# EAGLE board InkTime_v6 (EAGLE 9.7.0)
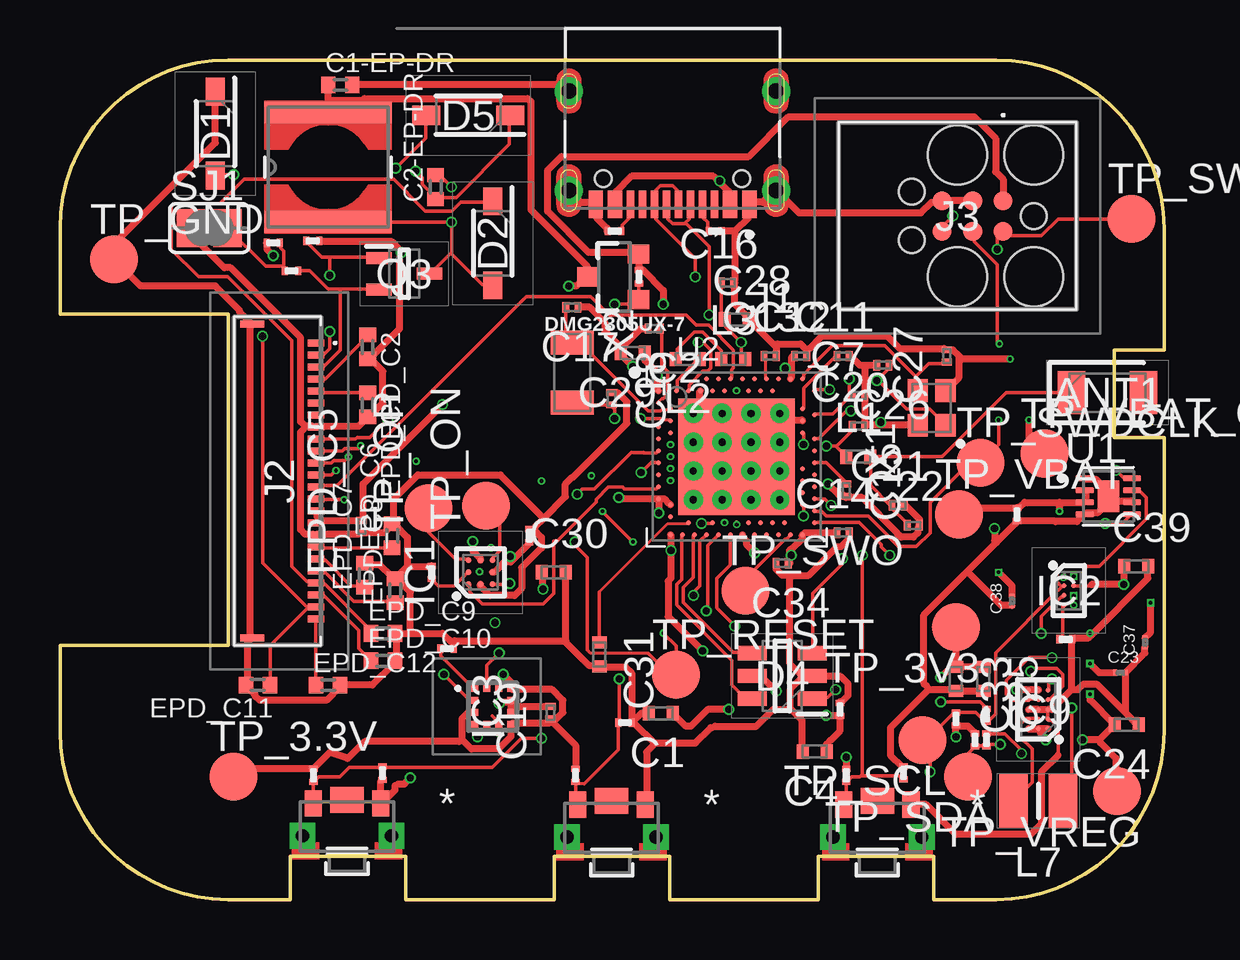
[diagram p0: board, top side]
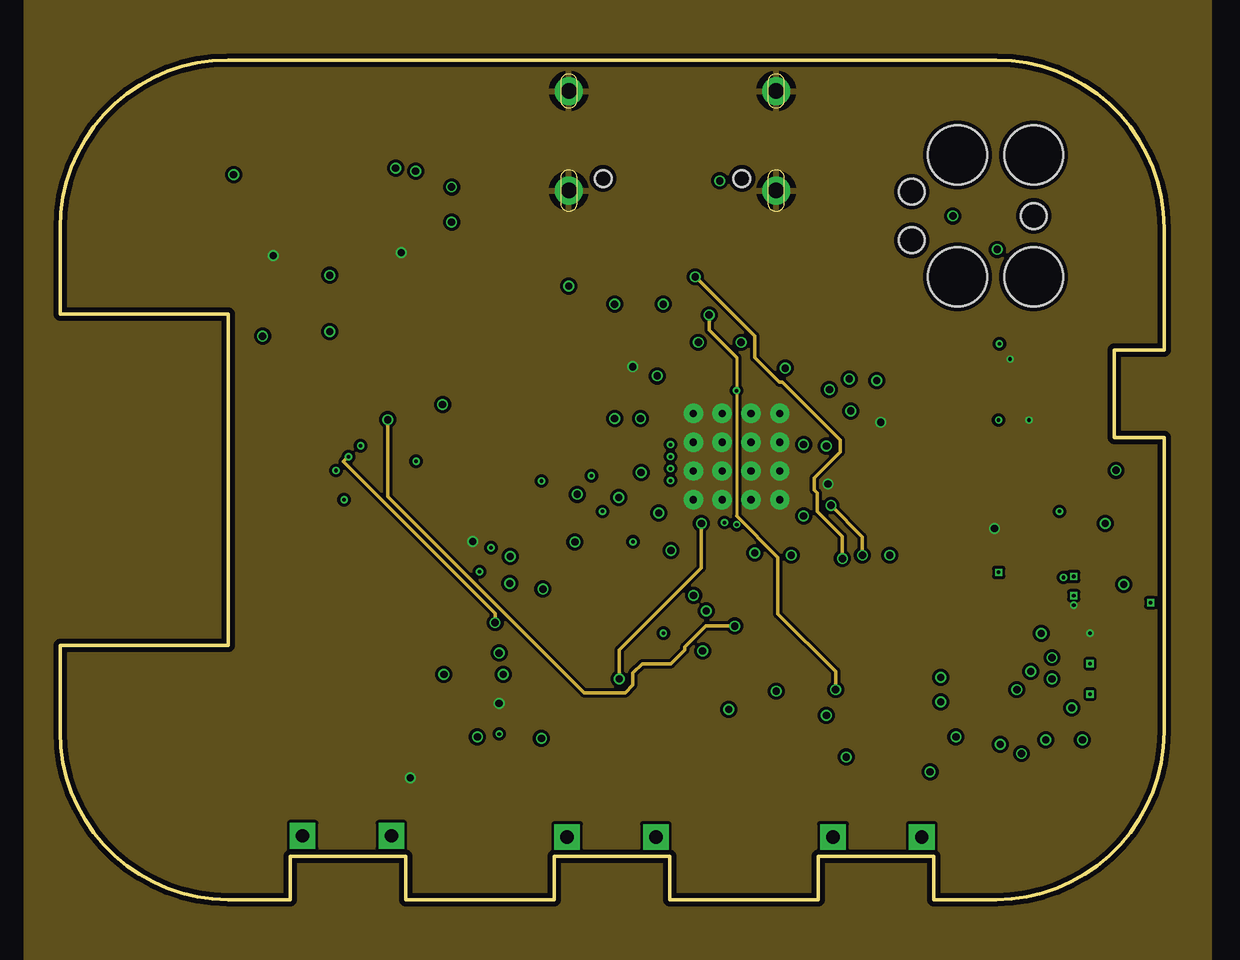
[diagram p1: board, inner layer Route2]
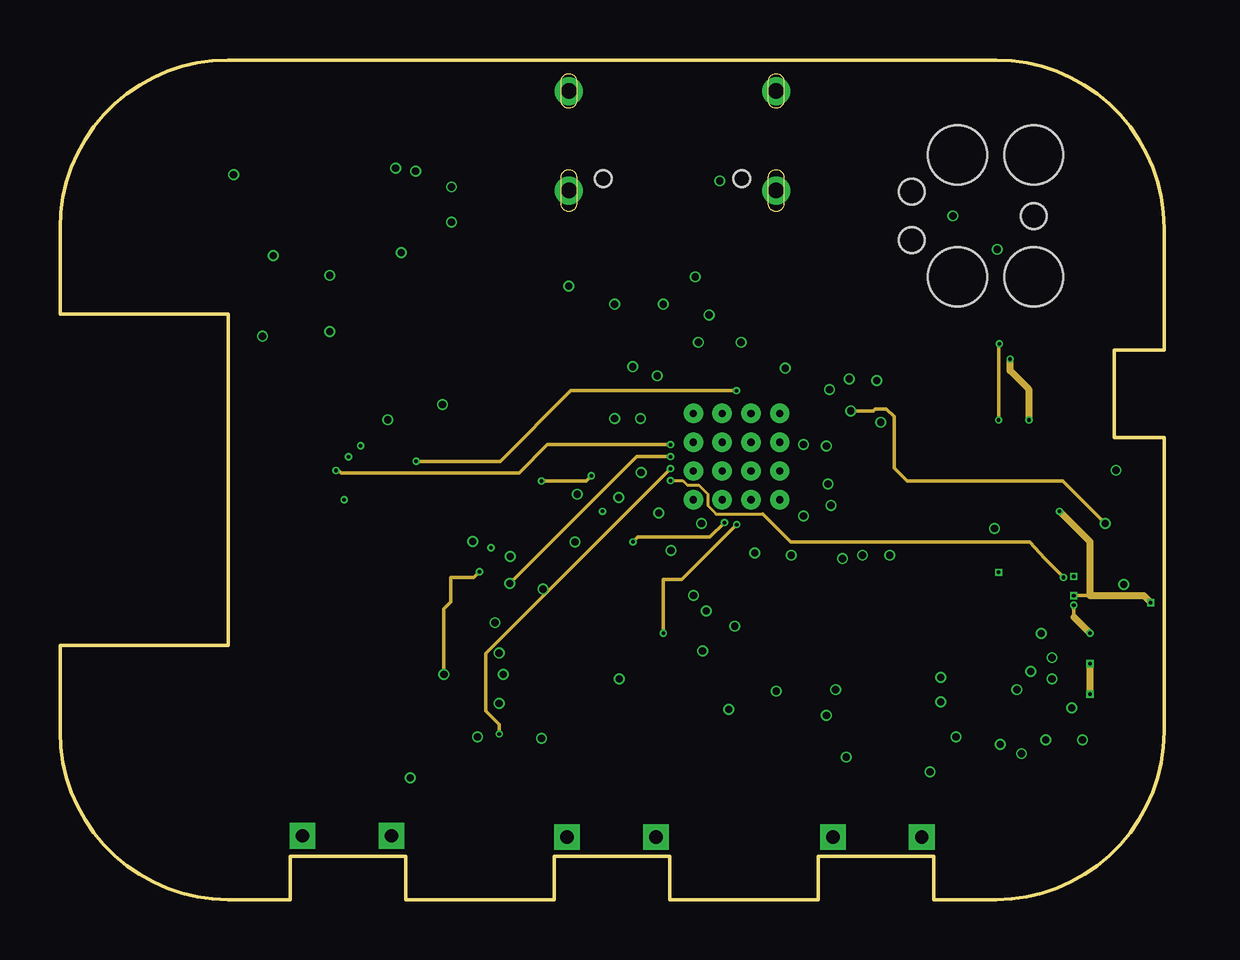
[diagram p2: board, inner layer Route15]
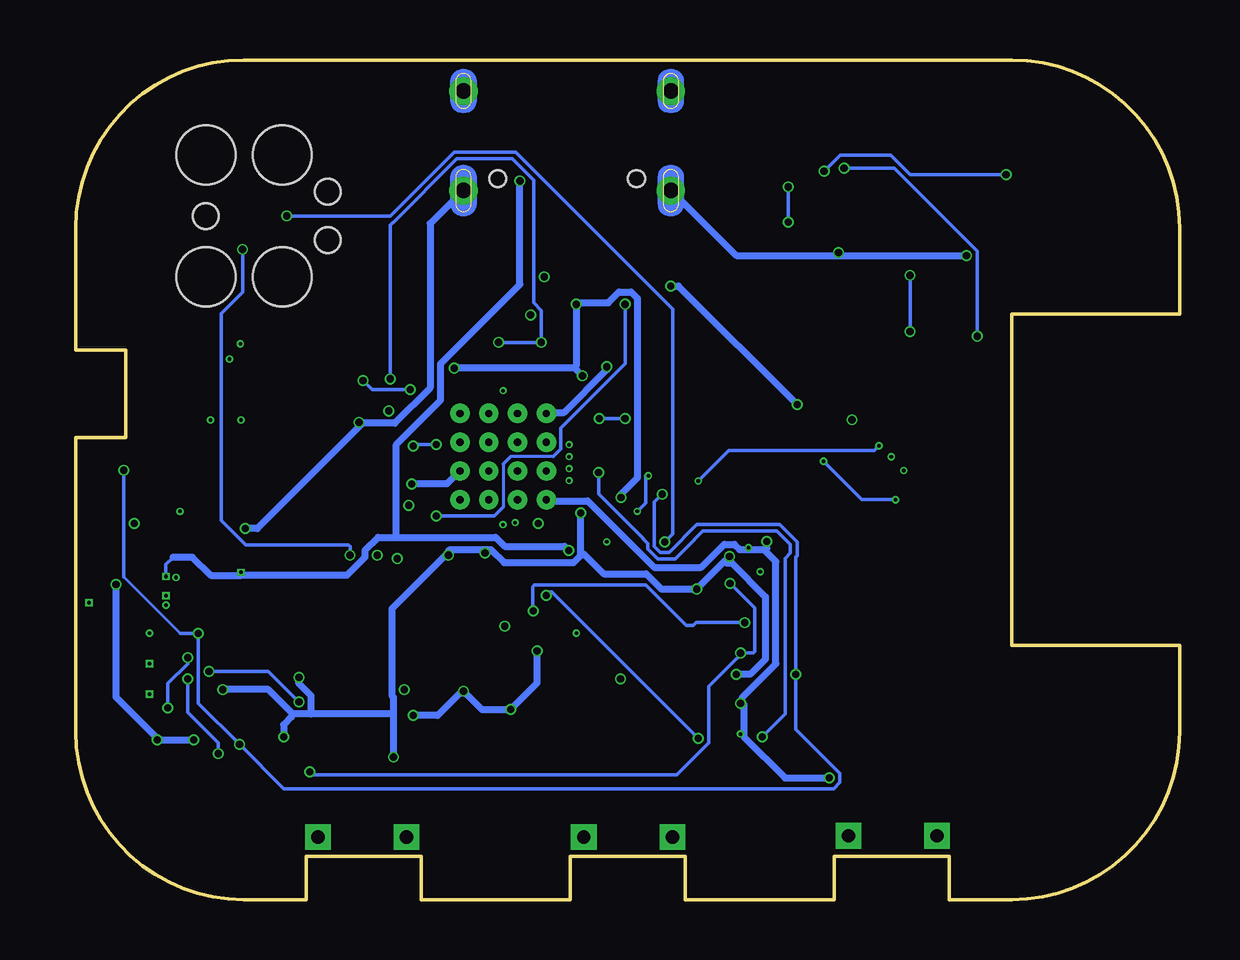
[diagram p3: board, bottom side, seen from below]

Size 46 x 35 mm. Coordinates in mm from the lower left corner, seen from the top.
Outline: 39,0 36.4,0 36.4,1.8 31.6,1.8 31.6,0 25.4,0 25.4,1.8 20.6,1.8 20.6,0 14.4,0 14.4,1.8 9.6,1.8 9.6,0 7,0 arc-90 0,7 0,10.6 7,10.6 7,24.4 0,24.4 0,28 arc-90 7,35 39,35 arc-90 46,28 46,22.91 43.92,22.91 43.92,19.26 46,19.26 46,7 arc-90 39,0
Copper layers (1+2*15+16): Top 0.035mm / dielectric 1.6mm / Route2 0.035mm / dielectric 0.15mm / Route15 0.035mm / dielectric 0.2mm / Bottom 0.035mm
Design rules "jlcpcb-2layers.dru *": minimum track width 5mil, minimum drill 0.15mm, track to track 5mil, track to pad 5mil, pad to pad 5mil, via to via 5mil, smd to smd 5mil, copper to edge 0.2mm, drill to drill 6mil, minimum pad ring 10mil, minimum via ring 3mil, stop-mask expansion 4mil, vias tented up to drill 0mil, thermal gap 10mil
Net classes: 1 turnu : width 0.15 mm

## Footprints (pad centres in the part's own frame; a part is rotated, then mirrored left to right if it is on the bottom)
2450AT18B100E_ANTC3216X140N = smd 1.15 x 1.8: 1 -1.5,0; 2 1.5,0
NORDIC_NRF_3_RESC0402_L = smd 0.5 x 0.6: 1 -0.5,0; 2 0.5,0
PERFECT_0402_0402 = smd 0.6 x 0.7: 1 -0.5,0; 2 0.5,0
NORDIC_NRF_3_RESC0201_L = smd 0.28 x 0.43: 1 -0.255,0; 2 0.255,0
GRM011R60J152KE01L_1_0201 = smd 0.35 x 0.25: 1 0,0.275; 2 0,-0.275
GRM011R60J152KE01L_2_CAPC0201X13N = smd 0.22 x 0.23: 1 -0.185,0; 2 0.185,0
ESP32_C6_LIBRARY_5_SOD3716X135N = smd 1.15 x 0.8: 1 -1.75,0; 2 1.75,0
ESP32_C6_LIBRARY_3_SOT95P280X145-6N = smd 1.2 x 0.6: 1 -1.25,0.95; 2 -1.25,0; 3 -1.25,-0.95; 4 1.25,-0.95; 5 1.25,0; 6 1.25,0.95
ESP32_C6_LIBRARY_4_ESP32_C6_LIBRARY_4_ESP32_C6_LIBRARY_4_ESP32_C6_LIBRARY_4_ESP32_WROVER_SPARKFUN-DISCRETESEMI_SOT23-3 = smd 0.8 x 0.9: 1 -0.95,-1; 2 0.95,-1; 3 0,1.1
DRV2605YZFR_BGA9C50P3X3_144X144X62 = smd 0.25 x 0.25: A1 -0.5,0.5; A2 0,0.5; A3 0.5,0.5; B1 -0.5,0; B2 0,0; B3 0.5,0; C1 -0.5,-0.5; C2 0,-0.5; C3 0.5,-0.5
BQ25180YBGR_BGA8C40P2X4_100X155X50 = smd 0.2 x 0.2: A1 -0.2,0.6; A2 0.2,0.6; B1 -0.2,0.2; B2 0.2,0.2; C1 -0.2,-0.2; C2 0.2,-0.2; D1 -0.2,-0.6; D2 0.2,-0.6
BMA423_BMA423 = smd 0.3 x 0.35: 1 -0.75,-0.775; 2 -0.25,-0.775; 3 0.25,-0.775; 4 0.75,-0.775; 7 0.75,0.775; 8 0.25,0.775; 9 -0.25,0.775; 10 -0.75,0.775 | smd 0.35 x 0.3: 5 0.775,-0.25; 6 0.775,0.25; 11 -0.775,0.25; 12 -0.775,-0.25
RT6160AWSC_BGA15C40P3X5_140X230X60 = smd 0.216 x 0.216: A1 -0.4,0.8; A2 0,0.8; A3 0.4,0.8; B1 -0.4,0.4; B2 0,0.4; B3 0.4,0.4; C1 -0.4,0; C2 0,0; C3 0.4,0; D1 -0.4,-0.4; D2 0,-0.4; D3 0.4,-0.4; E1 -0.4,-0.8; E2 0,-0.8; E3 0.4,-0.8
KH-TYPE-C-16P_KINGHELM_KH-TYPE-C-16P = smd 0.6 x 1.15: A1_B12 -3.2,4.725; A4_B9 -2.4,4.725; A9_B4 2.4,4.725; A12_B1 3.2,4.725 | smd 0.3 x 1.15: A5 -1.25,4.725; A6 -0.25,4.725; A7 0.25,4.725; A8 1.25,4.725; B5 1.75,4.725; B6 0.75,4.725; B7 -0.75,4.725; B8 -1.75,4.725 | drill 0.65 pad 1.05: SH1 -4.32,0; SH2 4.32,0; SH3 -4.32,4.15; SH4 4.32,4.15 | hole 0.7: -2.89,3.65; 2.89,3.65
503480-2400_5034802400 = smd 0.3 x 0.7: 1 -5.75,1.525; 2 -5.25,1.525; 3 -4.75,1.525; 4 -4.25,1.525; 5 -3.75,1.525; 6 -3.25,1.525; 7 -2.75,1.525; 8 -2.25,1.525; 9 -1.75,1.525; 10 -1.25,1.525; 11 -0.75,1.525; 12 -0.25,1.525; 13 0.25,1.525; 14 0.75,1.525; 15 1.25,1.525; 16 1.75,1.525; 17 2.25,1.525; 18 2.75,1.525; 19 3.25,1.525; 20 3.75,1.525; 21 4.25,1.525; 22 4.75,1.525; 23 5.25,1.525; 24 5.75,1.525 | smd 0.3 x 1: MP1 -6.54,-1.125; MP2 6.54,-1.125
TC2030-IDC_TC2030IDC = smd 0.783 x 0.783: 1 -0.953,-0.635; 2 -0.953,0.635; 3 0.317,-0.635; 4 0.317,0.635; 5 1.588,-0.635; 6 1.588,0.635 | hole 2.451: -2.223,-2.54; -2.223,2.54; 0.952,-2.54; 0.952,2.54 | hole 1.067: -2.223,0; 2.857,-1.016; 2.857,1.016
NORDIC_NRF_2_RESC0402_L = smd 0.5 x 0.6: 1 -0.5,0; 2 0.5,0
ESP32_C6_LIBRARY_2_IND_4828-WE-TPC_WRE = smd 0.9 x 5.3: 1 -2.286,0; 2 2.286,0
MLP2016SR47MT0S1_INDC2016X100N = smd 1.2 x 2.2: 1 -1.028,0; 2 1.028,0
ESP32_C6_LIBRARY_6_SOT65P210X110-3N = smd 1.05 x 0.5: 1 -1.05,0.65; 2 -1.05,-0.65; 3 1.05,0
CPF0201D7K68C1_0201 = smd 0.35 x 0.25: 1 0,0.275; 2 0,-0.275
ERA-1AEB3401C_0201 = smd 0.35 x 0.25: 1 0,0.275; 2 0,-0.275
ESP32_C6_LIBRARY_7_JUMPER_SJ = smd 1.168 x 1.6: 1 -0.762,0; 2 0.762,0
2025-10-22_07-23-44_LIBRARY_SW_EVP-AKE31A_PAN = smd 0.711 x 1.092: 1 -1.4,-0.972; 2 1.4,-0.972 | drill 0.559 pad 0.914 square: 3 -1.848,0.381; 4 1.848,0.381 | smd 1.397 x 1.092: 5 0,-1.124
HECTOR_WATCH_1_TP20R = smd 2 x 2: TP 0,0
ESP32_C6_LIBRARY_SON50P200X200X80-9N = smd 0.76 x 0.27: 1 -0.985,0.75; 2 -0.985,0.25; 3 -0.985,-0.25; 4 -0.985,-0.75; 5 0.985,-0.75; 6 0.985,-0.25; 7 0.985,0.25; 8 0.985,0.75 | smd 0.9 x 1.3: 9 0,0
NORDIC_NRF_4_AQFN50P700X700X85_HS-74N = smd 4.85 x 4.85: P$74 0,0 | drill 0.3 pad 0.6: P$75 -1.8,1.8; P$76 -0.6,1.8; P$77 0.6,1.8; P$78 1.8,1.8; P$79 -1.8,0.6; P$80 -0.6,0.6; P$81 0.6,0.6; P$82 1.8,0.6; P$83 -1.8,-0.6; P$84 -0.6,-0.6; P$85 0.6,-0.6; P$86 1.8,-0.6; P$87 -1.8,-1.8; P$88 -0.6,-1.8; P$89 0.6,-1.8; P$90 1.8,-1.8 | smd 0.2 x 0.2: P$A8 -1.25,3.25; P$A10 -0.75,3.25; P$A12 -0.25,3.25; P$A14 0.25,3.25; P$A16 0.75,3.25; P$A18 1.25,3.25; P$A20 1.75,3.25; P$A22 2.25,3.25; P$A23 2.75,3.25; P$AA24 3.25,-2.25; P$AB2 -2.75,-2.5; P$AC5 -2,-2.75; P$AC9 -1,-2.75; P$AC11 -0.5,-2.75; P$AC13 0,-2.75; P$AC15 0.5,-2.75; P$AC17 1,-2.75; P$AC19 1.5,-2.75; P$AC21 2,-2.75; P$AC24 3.25,-2.75; P$AD2 -2.75,-3.25; P$AD4 -2.25,-3.25; P$AD6 -1.75,-3.25; P$AD8 -1.25,-3.25; P$AD10 -0.75,-3.25; P$AD12 -0.25,-3.25; P$AD14 0.25,-3.25; P$AD16 0.75,-3.25; P$AD18 1.25,-3.25; P$AD20 1.75,-3.25; P$AD22 2.25,-3.25; P$AD23 2.75,-3.25; P$B1 -3.25,2.75; P$B3 -2.5,2.75; P$B5 -2,2.75; P$B7 -1.5,2.75; P$B9 -1,2.75; P$B11 -0.5,2.75; P$B13 0,2.75; P$B15 0.5,2.75; P$B17 1,2.75; P$B19 1.5,2.75; P$B24 3.25,2.75; P$C1 -3.25,2.25; P$D2 -2.75,2; P$D23 2.75,2; P$E24 3.25,1.75; P$F2 -2.75,1.5; P$F23 2.75,1.5; P$G1 -3.25,1.25; P$H2 -2.75,1; P$H23 2.75,1; P$J1 -3.25,0.75; P$J24 3.25,0.75; P$K2 -2.75,0.5; P$L1 -3.25,0.25; P$L24 3.25,0.25; P$M2 -2.75,0; P$N1 -3.25,-0.25; P$N24 3.25,-0.25; P$P2 -2.75,-0.5; P$P23 2.75,-0.5; P$R1 -3.25,-0.75; P$R24 3.25,-0.75; P$T2 -2.75,-1; P$T23 2.75,-1; P$U1 -3.25,-1.25; P$U24 3.25,-1.25; P$V23 2.75,-1.5; P$W1 -3.25,-1.75; P$W24 3.25,-1.75; P$Y2 -2.75,-2; P$Y23 2.75,-2
NORDIC_NRF_BT-XTAL_2016_N = smd 0.95 x 0.85: 1 -0.725,-0.575; 2 0.725,-0.575; 3 0.725,0.575; 4 -0.725,0.575
NORDIC_NRF_1_XTAL_3215_N = smd 1 x 1.8: 1 -1.25,0; 2 1.25,0

## Placement (x,y rotation side)
ANT1  2450AT18B100E  [2450AT18B100E_ANTC3216X140N]  43.65,21.13 0 top
C1  4.7μF  [NORDIC_NRF_3_RESC0402_L]  25.04,7.77 180 top
C1-EP-DR  10uF  [PERFECT_0402_0402]  11.68,33.96 0 top
C2  100nF  [NORDIC_NRF_3_RESC0201_L]  24.76,23.8 180 top
C2-EP-DR  4.7uF/25V  [PERFECT_0402_0402]  15.65,29.7 90 top
C3  1uF  [GRM011R60J152KE01L_1_0201]  15.49,13.64 0 top
C4  4.7uF  [NORDIC_NRF_3_RESC0402_L]  31.44,6.17 180 top
C5  1uF  [GRM011R60J152KE01L_1_0201]  13.44,5.27 180 top
C6  0.1uF  [GRM011R60J152KE01L_1_0201]  32.51,7.92 180 top
C7  N.C.  [NORDIC_NRF_3_RESC0201_L]  33.27,21.01 0 top
C8  0.1uF  [GRM011R60J152KE01L_1_0201]  19.55,15.16 0 top
C9  0.1uF  [GRM011R60J152KE01L_1_0201]  39.87,16.05 180 top
C10  1uF  [GRM011R60J152KE01L_1_0201]  23.54,7.37 270 top
C11  100pF  [NORDIC_NRF_3_RESC0201_L]  32.63,22.66 0 top
C12  100nF  [NORDIC_NRF_3_RESC0201_L]  30.86,22.66 0 top
C13  N.C.  [NORDIC_NRF_3_RESC0201_L]  29.58,22.66 0 top
C14  100nF  [NORDIC_NRF_3_RESC0201_L]  32.63,15.29 0 top
C15  820pF  [NORDIC_NRF_3_RESC0201_L]  32.76,17.07 270 top
C16  47nF  [NORDIC_NRF_3_RESC0201_L]  27.81,25.71 0 top
C17  12pF  [NORDIC_NRF_3_RESC0201_L]  21.33,24.69 180 top
C18  12pF  [NORDIC_NRF_3_RESC0201_L]  22.98,20.88 270 top
C19  100nF  [NORDIC_NRF_3_RESC0201_L]  20.44,7.8 90 top
C20  1pF  [NORDIC_NRF_3_RESC0201_L]  33.27,19.74 0 top
C21  1pF  [NORDIC_NRF_3_RESC0201_L]  34.92,16.43 0 top
C22  N.C.  [NORDIC_NRF_3_RESC0201_L]  35.55,15.6 0 top
C23  0.1uF  [GRM011R60J152KE01L_2_CAPC0201X13N]  44.19,9.45 0 top
C24  10uF  [NORDIC_NRF_3_RESC0402_L]  44.44,7.29 180 top
C25  22uF  [NORDIC_NRF_3_RESC0402_L]  38.47,9.2 270 top
C26  12pF  [NORDIC_NRF_3_RESC0201_L]  34.28,22.28 180 top
C27  12pF  [NORDIC_NRF_3_RESC0201_L]  36.95,22.66 90 top
C28  1.0μF  [NORDIC_NRF_3_RESC0402_L]  28.19,24.18 0 top
C29  4.7μF  [NORDIC_NRF_3_RESC0402_L]  23.87,22.78 180 top
C30  4.7μF  [NORDIC_NRF_3_RESC0402_L]  20.57,13.64 0 top
C31  4.7μF  [NORDIC_NRF_3_RESC0402_L]  22.47,10.21 270 top
C32  1uF  [GRM011R60J152KE01L_1_0201]  35.15,5.28 0 top
C33  22uF  [NORDIC_NRF_3_RESC0402_L]  37.33,9.2 270 top
C34  100nF  [NORDIC_NRF_3_RESC0201_L]  30.09,14.02 180 top
C37  1uF  [GRM011R60J152KE01L_2_CAPC0201X13N]  45.21,10.72 90 top
C38  1uF  [GRM011R60J152KE01L_2_CAPC0201X13N]  39.66,12.44 90 top
C39  10uF  [NORDIC_NRF_3_RESC0402_L]  44.85,13.89 0 top
D1  MBR0530  [ESP32_C6_LIBRARY_5_SOD3716X135N]  6.47,31.93 270 top
D2  MBR0530  [ESP32_C6_LIBRARY_5_SOD3716X135N]  18.03,27.36 270 top
D4  USBLC6-2SC6Y  [ESP32_C6_LIBRARY_3_SOT95P280X145-6N]  30.09,9.32 180 top
D5  MBR0530  [ESP32_C6_LIBRARY_5_SOD3716X135N]  17.01,32.69 180 top
DMG2305UX-7  20V/4.2A/52mΩ/1.4W  [ESP32_C6_LIBRARY_4_ESP32_C6_LIBRARY_4_ESP32_C6_LIBRARY_4_ESP32_C6_LIBRARY_4_ESP32_WROVER_SPARKFUN-DISCRETESEMI_SOT23-3]  23.11,25.96 90 top
EPD_C1  1uF/50V  [PERFECT_0402_0402]  12.82,20.62 270 top
EPD_C2  1uF/50V  [PERFECT_0402_0402]  12.82,23.04 270 top
EPD_C5  0.1uF/50V  [NORDIC_NRF_3_RESC0201_L]  12.57,15.55 90 top
EPD_C6  1uF/50V  [PERFECT_0402_0402]  13.84,15.16 90 top
EPD_C7  1uF/50V  [PERFECT_0402_0402]  12.69,13.51 90 top
EPD_C8  1uF/50V  [PERFECT_0402_0402]  13.96,12.88 90 top
EPD_C9  1uF/50V  [PERFECT_0402_0402]  13.46,11.1 0 top
EPD_C10  1uF/50V  [PERFECT_0402_0402]  13.46,9.96 0 top
EPD_C11  1uF/50V  [PERFECT_0402_0402]  8.25,8.94 180 top
EPD_C12  1uF/50V  [PERFECT_0402_0402]  11.17,8.94 0 top
IC1  DRV2605YZFR  [DRV2605YZFR_BGA9C50P3X3_144X144X62]  17.52,13.64 90 top
IC2  BQ25180YBGR  [BQ25180YBGR_BGA8C40P2X4_100X155X50]  42.03,12.88 0 top
IC3  BMA421  [BMA423_BMA423]  18.03,8.05 270 top
IC9  RT6160AWSC  [RT6160AWSC_BGA15C40P3X5_140X230X60]  40.76,7.92 180 top
J1  KH-TYPE-C-16P  [KH-TYPE-C-16P_KINGHELM_KH-TYPE-C-16P]  25.52,33.71 180 top
J2  503480-2400  [503480-2400_5034802400]  9.14,17.45 270 top
J3  TC2030-IDC  [TC2030-IDC_TC2030IDC]  38.35,28.5 180 top
L1  3.9nH  [NORDIC_NRF_2_RESC0402_L]  33.27,18.47 0 top
L2  10μH  [NORDIC_NRF_2_RESC0402_L]  26.16,22.53 180 top
L3  15nH  [NORDIC_NRF_2_RESC0402_L]  28.06,22.53 0 top
L5  68uH  [ESP32_C6_LIBRARY_2_IND_4828-WE-TPC_WRE]  11.17,30.53 90 top
L7  FTC252012SR47MBCA  [MLP2016SR47MT0S1_INDC2016X100N]  40.76,4.12 0 top
Q3  SI1308EDL-T1-GE3  [ESP32_C6_LIBRARY_6_SOT65P210X110-3N]  14.34,26.09 0 top
R1  10K  [CPF0201D7K68C1_0201]  41.9,10.85 270 top
R1_EP_DR1  0.47  [CPF0201D7K68C1_0201]  9.65,26.21 90 top
R1_USB  5K1  [CPF0201D7K68C1_0201]  27.3,27.86 270 top
R2  0  [CPF0201D7K68C1_0201]  38.6,6.66 180 top
R2_EP_DR  10K  [CPF0201D7K68C1_0201]  10.53,27.46 270 top
R2_USB  5K1  [CPF0201D7K68C1_0201]  23.11,27.86 270 top
R3  0  [CPF0201D7K68C1_0201]  16.12,10.47 270 top
R4  0  [CPF0201D7K68C1_0201]  38.6,7.67 180 top
R5  10K  [CPF0201D7K68C1_0201]  10.56,5.18 180 top
R7  10K  [CPF0201D7K68C1_0201]  32.76,5.18 180 top
R8  10K  [CPF0201D7K68C1_0201]  21.48,5.18 180 top
R17  3K3  [ERA-1AEB3401C_0201]  37.33,7.54 180 top
R18  3K3  [ERA-1AEB3401C_0201]  38.12,6.66 0 top
R_PWR_EPD  10K  [CPF0201D7K68C1_0201]  24.12,25.96 180 top
R_TYPE_SEL  2.2  [CPF0201D7K68C1_0201]  8.88,27.38 90 top
SJ1  [ESP32_C6_LIBRARY_7_JUMPER_SJ]  6.22,27.99 0 top
SW_DN  2025-10-22_07-23-44_LIBRARY_EVP-AKE31ASW_EVP-AKE31A_PAN  [2025-10-22_07-23-44_LIBRARY_SW_EVP-AKE31A_PAN]  34.06,2.99 180 top
SW_ENT  2025-10-22_07-23-44_LIBRARY_EVP-AKE31ASW_EVP-AKE31A_PAN  [2025-10-22_07-23-44_LIBRARY_SW_EVP-AKE31A_PAN]  22.98,2.99 180 top
SW_UP  2025-10-22_07-23-44_LIBRARY_EVP-AKE31ASW_EVP-AKE31A_PAN  [2025-10-22_07-23-44_LIBRARY_SW_EVP-AKE31A_PAN]  11.96,3.04 180 top
TP_3.3V  HECTOR_WATCH_1_TPTP20R  [HECTOR_WATCH_1_TP20R]  7.23,5.13 0 top
TP_3V3  HECTOR_WATCH_1_TPTP20R  [HECTOR_WATCH_1_TP20R]  37.33,11.35 180 top
TP_GND  HECTOR_WATCH_1_TPTP20R  [HECTOR_WATCH_1_TP20R]  2.25,26.69 0 top
TP_ON  HECTOR_WATCH_1_TPTP20R  [HECTOR_WATCH_1_TP20R]  17.74,16.41 90 top
TP_OP  HECTOR_WATCH_1_TPTP20R  [HECTOR_WATCH_1_TP20R]  15.36,16.31 90 top
TP_RESET  HECTOR_WATCH_1_TPTP20R  [HECTOR_WATCH_1_TP20R]  25.67,9.37 0 top
TP_SCL  HECTOR_WATCH_1_TPTP20R  [HECTOR_WATCH_1_TP20R]  35.94,6.66 180 top
TP_SDA  HECTOR_WATCH_1_TPTP20R  [HECTOR_WATCH_1_TP20R]  37.84,5.13 180 top
TP_SWDCLK  HECTOR_WATCH_1_TPTP20R  [HECTOR_WATCH_1_TP20R]  38.35,18.21 0 top
TP_SWIO  HECTOR_WATCH_1_TPTP20R  [HECTOR_WATCH_1_TP20R]  44.65,28.38 0 top
TP_SWO  HECTOR_WATCH_1_TPTP20R  [HECTOR_WATCH_1_TP20R]  28.57,12.88 0 top
TP_VBAT  HECTOR_WATCH_1_TPTP20R  [HECTOR_WATCH_1_TP20R]  37.46,16.05 0 top
TP_VBAT_GND  HECTOR_WATCH_1_TPTP20R  [HECTOR_WATCH_1_TP20R]  41.02,18.59 0 top
TP_VREG  HECTOR_WATCH_1_TPTP20R  [HECTOR_WATCH_1_TP20R]  44.04,4.51 180 top
U1  MAX17048G+T10  [ESP32_C6_LIBRARY_SON50P200X200X80-9N]  43.68,16.81 0 top
U2  NRF52840_QF  [NORDIC_NRF_4_AQFN50P700X700X85_HS-74N]  28.19,18.47 0 top
X1  32MHz  [NORDIC_NRF_BT-XTAL_2016_N]  36.32,20.5 90 top
X2  32.768kHz  [NORDIC_NRF_1_XTAL_3215_N]  21.34,21.97 270 top

## Library data of the parts
ANT1 = InkTime_v5; ARROW_PART_NUMBER: 2450AT18B100E; ARROW_PRICE-STOCK: https://www.arrow.com/en/products/2450at18b100e/johanson-dielectrics?utm_currency=USD&region=nac; DESCRIPTION: Antennas 2.45GHz ANTENNA; HEIGHT: 1.4mm; MANUFACTURER_NAME: JOHANSON TECHNOLOGY; MANUFACTURER_PART_NUMBER: 2450AT18B100E; MOUSER_PART_NUMBER: 609-2450AT18B100E; MOUSER_PRICE-STOCK: https://www.mouser.co.uk/ProductDetail/Johanson-Technology/2450AT18B100E?qs=yCnrNFeXz%252Bh5MFsFIXGZGA%3D%3D
C1 C2 C4 C7 C11-C22 C24-C28 C30 C31 C33 C39 L1-L3 R1-R4 R17 R18 TP_3.3V TP_3V3 TP_GND TP_RESET TP_SCL TP_SDA TP_SWDCLK TP_SWIO TP_SWO TP_VREG U2 X1 = InkTime_v5
C1-EP-DR C2-EP-DR C3 C5 C6 C8-C10 C29 C32 C34 EPD_C1 EPD_C2 EPD_C5-EPD_C12 R1_EP_DR1 R1_USB R2_EP_DR R2_USB R5 R7 R8 R_PWR_EPD R_TYPE_SEL SJ1 TP_ON TP_OP TP_VBAT TP_VBAT_GND X2 = Library_proiect
C23 C37 C38 = InkTime_v5; AVAILABILITY: In Stock; CHECK_PRICES: https://www.snapeda.com/parts/GRM011R60J152KE01L/Murata/view-part/?ref=eda; DESCRIPTION: SMD Capacitor X5R(EIA) with Capacitance: 1500pF Tol. 10%. Rated Voltage: 6.3Vdc; MF: Murata; MP: GRM011R60J152KE01L; PACKAGE: 0201 Murata; PRICE: None; SNAPEDA_LINK: https://www.snapeda.com/parts/GRM011R60J152KE01L/Murata/view-part/?ref=snap
D1 D2 D5 = Library_proiect; AVAILABILITY: In Stock; CHECK_PRICES: https://www.snapeda.com/parts/MBR0530/Onsemi/view-part/?ref=eda; DESCRIPTION: Diode Schottky 30 V 500mA Surface Mount SOD-123; MF: ON Semiconductor; MP: MBR0530; PACKAGE: SOD-123-2 ON Semiconductor; PRICE: None; PURCHASE-URL: https://www.snapeda.com/api/url_track_click_mouser/?unipart_id=179458&manufacturer=ON Semiconductor&part_name=MBR0530&search_term=None; SNAPEDA_LINK: https://www.snapeda.com/parts/MBR0530/Onsemi/view-part/?ref=snap
D4 = Library_proiect; AVAILABILITY: In Stock; CHECK_PRICES: https://www.snapeda.com/parts/USBLC6-2SC6Y/STMicroelectronics/view-part/?ref=eda; DESCRIPTION: 17V Clamp 5A (8/20µs) Ipp Tvs Diode Surface Mount SOT-23-6; MF: STMicroelectronics; MP: USBLC6-2SC6Y; PACKAGE: SOT-23-6 STMicroelectronics; PRICE: None; SNAPEDA_LINK: https://www.snapeda.com/parts/USBLC6-2SC6Y/STMicroelectronics/view-part/?ref=snap
DMG2305UX-7 = Library_proiect; PROD_ID: TRAN-14388
IC1 = Library_proiect; ARROW_PART_NUMBER: DRV2605YZFR; ARROW_PRICE-STOCK: https://www.arrow.com/en/products/drv2605yzfr/texas-instruments?region=nac; DESCRIPTION: Haptic Driver for ERM/LRA with Built-In Library and Smart Loop Architecture; HEIGHT: 0.625mm; MANUFACTURER_NAME: Texas Instruments; MANUFACTURER_PART_NUMBER: DRV2605YZFR
IC2 = InkTime_v5; ARROW_PART_NUMBER: BQ25180YBGR; ARROW_PRICE-STOCK: https://www.arrow.com/en/products/bq25180ybgr/texas-instruments?utm_currency=USD&region=nac; DESCRIPTION: Charger IC Lithium Ion/Polymer, Lithium Iron Phosphate 8-DSBGA (1.6x1.1); HEIGHT: 0.5mm; MANUFACTURER_NAME: Texas Instruments; MANUFACTURER_PART_NUMBER: BQ25180YBGR; MOUSER_PART_NUMBER: 595-BQ25180YBGR; MOUSER_PRICE-STOCK: https://www.mouser.co.uk/ProductDetail/Texas-Instruments/BQ25180YBGR?qs=doiCPypUmgEWjAK%252BJAX6Tw%3D%3D
IC3 = InkTime_v5; ARROW_PART_NUMBER: BMA423; ARROW_PRICE-STOCK: https://www.arrow.com/en/products/bma423/bosch; DESCRIPTION: Accelerometers Triaxial low-g 12bit Acceleration Sensor; HEIGHT: 1mm; MANUFACTURER_NAME: BOSCH; MANUFACTURER_PART_NUMBER: BMA423; MOUSER_PART_NUMBER: 262-BMA423; MOUSER_PRICE-STOCK: https://www.mouser.co.uk/ProductDetail/Bosch-Sensortec/BMA423?qs=HXFqYaX1Q2xC%252BSgeGoX3mg%3D%3D
IC9 = InkTime_v5; DESCRIPTION: Buck-Boost Regulator Positive Output Step-Up/Step-Down I2C DC-DC Controller IC 15-WL-CSP (BSC) (1.4x2.3); HEIGHT: 0.6mm; MANUFACTURER_NAME: RICHTEK; MANUFACTURER_PART_NUMBER: RT6160AWSC; MOUSER_PART_NUMBER: 835-RT6160AWSC; MOUSER_PRICE-STOCK: https://www.mouser.co.uk/ProductDetail/Richtek/RT6160AWSC?qs=amGC7iS6iy%2FLd9PSoixZXQ%3D%3D
J1 = Library_proiect; AVAILABILITY: Not in stock; CHECK_PRICES: https://www.snapeda.com/parts/KH-TYPE-C-16P/Kinghelm/view-part/?ref=eda; MF: kinghelm; MP: KH-TYPE-C-16P; PACKAGE: None; PRICE: None; SNAPEDA_LINK: https://www.snapeda.com/parts/KH-TYPE-C-16P/Kinghelm/view-part/?ref=snap
J2 = Library_proiect; DESCRIPTION: FFC & FPC Connectors 0.5mm FPC RA SMT Dual Contact 24Ckt; HEIGHT: 1.87mm; MANUFACTURER_NAME: Molex; MANUFACTURER_PART_NUMBER: 503480-2400; MOUSER_PART_NUMBER: 538-503480-2400; MOUSER_PRICE-STOCK: https://www.mouser.co.uk/ProductDetail/Molex/503480-2400?qs=OAhjpuo3Vu7efIoxFh9AOw%3D%3D
J3 = InkTime_v5; DESCRIPTION: CABLE ADAPTER 6 POS; HEIGHT: 19mm; MANUFACTURER_NAME: Tag Connect; MANUFACTURER_PART_NUMBER: TC2030-IDC
L5 = Library_proiect; COPYRIGHT: Copyright (C) 2024 Ultra Librarian. All rights reserved.; MANUFACTURER_PART_NUMBER: 744043680; MFR_NAME: Wurth Electronics
L7 = InkTime_v5; DESCRIPTION: SMD / SMT Inductors (Coils), L=0.47?H, L x W x T :; HEIGHT: 1mm; JLCPCB: https://jlcpcb.com/partdetail/6763488-FTC252012SR47MBCA/C5832368; MANUFACTURER_NAME: TDK; MANUFACTURER_PART_NUMBER: FTC252012SR47MBCA
Q3 = Library_proiect; AVAILABILITY: In Stock; CHECK_PRICES: https://www.snapeda.com/parts/SI1308EDL-T1-GE3/Vishay+Siliconix/view-part/?ref=eda; DESCRIPTION: Si1308EDL-T1-GE3 N-channel MOSFET Transistor, 1.5 A, 30 V, 3-Pin SC-70 | Siliconix / Vishay SI1308EDL-T1-GE3; MF: Vishay Siliconix; MP: SI1308EDL-T1-GE3; PACKAGE: SOT-323 Vishay Semiconductor; PRICE: None; PURCHASE-URL: https://www.snapeda.com/api/url_track_click_mouser/?unipart_id=274603&manufacturer=Vishay Siliconix&part_name=SI1308EDL-T1-GE3&search_term=None; SNAPEDA_LINK: https://www.snapeda.com/parts/SI1308EDL-T1-GE3/Vishay+Siliconix/view-part/?ref=snap
SW_DN SW_ENT SW_UP = Library_proiect; COPYRIGHT: Copyright (C) 2025 Ultra Librarian. All rights reserved.; DIGI-KEY_PART_NUMBER_1: P123437TR-ND; DIGI-KEY_PART_NUMBER_2: P123437CT-ND; DIGI-KEY_PART_NUMBER_3: P123437DKR-ND; MANUFACTURER_NAME: Panasonic; MANUFACTURER_PART_NUMBER: EVP-AKE31A
U1 = Library_proiect; AVAILABILITY: In Stock; CHECK_PRICES: https://www.snapeda.com/parts/MAX17048G+T10/Analog+Devices/view-part/?ref=eda; DESCRIPTION: 3µA 1-Cell/2-Cell Fuel Gauge with ModelGauge; MF: Analog Devices; MP: MAX17048G+T10; PACKAGE: TDFN-8 Maxim; PRICE: None; PURCHASE-URL: https://www.snapeda.com/api/url_track_click_mouser/?unipart_id=329239&manufacturer=Analog Devices&part_name=MAX17048G+T10&search_term=None; SNAPEDA_LINK: https://www.snapeda.com/parts/MAX17048G+T10/Analog+Devices/view-part/?ref=snap

## Nets
3V3: C8.2 C12.1 C14.1 C19.1 C25.1 C29.1 C30.1 C33.1 C34.1 DMG2305UX-7.2 IC1.C2 IC3.3 IC3.7 IC3.10 IC9.E2 IC9.E3 J3.1 R5.2 R7.2 R8.2 R17.1 R18.1 R_PWR_EPD.2 TP_3.3V.TP TP_3V3.TP U2.P$A22 U2.P$AD14 U2.P$AD23 U2.P$B1 U2.P$W1 U2.P$Y2
ALERT: U1.5 U2.P$J24
D+: D4.4 U2.P$AD6
D-: D4.6 U2.P$AD4
DEC1: C2.1 U2.P$C1
DEC3: C11.1 U2.P$D23
DEC4_6: C7.1 C16.1 C28.1 L3.2 U2.P$B5 U2.P$E24
DN: D4.1 J1.A7 J1.B7
DP: D4.3 J1.A6 J1.B6
EPD_3V3: C1-EP-DR.1 DMG2305UX-7.3 EPD_C5.2 J2.15 J2.16 L5.2
EPD_BUSY: J2.9 U2.P$AD12
EPD_CS: J2.12 U2.P$K2
EPD_DC: J2.11 U2.P$AD10
EPD_RST: J2.10 U2.P$AC11
GDR: J2.2 Q3.1 R2_EP_DR.2
GND: C1-EP-DR.2 C1.2 C2.2 C3.1 C4.2 C5.1 C6.2 C7.2 C8.1 C9.1 C10.1 C11.2 C12.2 C13.2 C14.2 C15.2 C16.2 C17.1 C18.1 C19.2 C20.2 C21.2 C22.2 C23.2 C24.1 C25.2 C26.2 C27.2 C28.2 C29.2 C30.2 C31.2 C32.1 C33.2 C34.2 C37.1 C38.1 C39.2 D1.1 D4.2 EPD_C1.2 EPD_C2.2 EPD_C5.1 EPD_C6.2 EPD_C7.2 EPD_C8.2 EPD_C9.2 EPD_C10.2 EPD_C11.2 EPD_C12.2 IC1.B1 IC1.B3 IC2.D2 IC3.8 IC3.9 IC9.B1 IC9.C1 IC9.C2 IC9.C3 J1.A1_B12 J1.A12_B1 J1.SH1 J1.SH2 J1.SH3 J1.SH4 J2.8 J2.17 J2.MP1 J2.MP2 J3.3 J3.5 R1.1 R1_USB.1 R2_EP_DR.1 R2_USB.2 R3.1 R_TYPE_SEL.1 SJ1.1 SW_DN.1 SW_ENT.1 SW_UP.1 TP_GND.TP TP_VBAT_GND.TP U1.1 U1.4 U1.6 U1.9 U2.P$74 U2.P$75 U2.P$76 U2.P$77 U2.P$78 U2.P$79 U2.P$80 U2.P$81 U2.P$82 U2.P$83 U2.P$84 U2.P$85 U2.P$86 U2.P$87 U2.P$88 U2.P$89 U2.P$90 U2.P$B7 U2.P$F23 X1.2 X1.4
HAPTIC_EN: IC1.A1 U2.P$U1
IMU_INT1: IC3.5 U2.P$N1
IMU_INT2: IC3.6 U2.P$P2
LX1: IC9.B2 IC9.B3 L7.1
LX2: IC9.D2 IC9.D3 L7.2
MOSI: J2.14 U2.P$B13
N$1: C2-EP-DR.1 D1.2 D5.1
N$2: C2-EP-DR.2 D2.2 L5.1 Q3.3
N$3: R1_EP_DR1.1 R_TYPE_SEL.2 SJ1.2
N$4: IC2.D1 R1.2
N$5: C3.2 IC1.A2
N$6: J1.B5 R2_USB.1
N$7: EPD_C6.1 J2.18
N$8: EPD_C7.1 J2.19
N$9: EPD_C2.1 J2.4
N$10: J1.A5 R1_USB.2
N$11: EPD_C1.1 J2.5
N$12: EPD_C8.1 J2.20
N$14: EPD_C10.1 J2.22
N$16: EPD_C12.1 J2.24
N$17: IC9.D1 R4.2
N$18: IC9.E1 R2.2
N$19: IC3.1 R3.2
N$20: C31.1 U2.P$AC5
N$21: C17.2 U2.P$D2 X2.1
N$22: C18.2 U2.P$F2 X2.2
N$23: L2.1 U2.P$B3
N$24: L2.2 L3.1
N$25: C13.1 U2.P$A18
N$26: C15.1 U2.P$N24
N$27: C20.1 L1.1 U2.P$H23
N$28: C26.1 U2.P$B24 X1.1
N$29: C27.1 U2.P$A23 X1.3
OUT+: IC1.A3 TP_OP.TP
OUT-: IC1.C3 TP_ON.TP
P0.04: U2.P$J1
P0.09: U2.P$L24
P0.13: C5.2 R5.1 SW_UP.2 U2.P$AD8
P0.14: C10.2 R8.1 SW_ENT.2 U2.P$AC9
P0.19: U2.P$AC15
P0.20: U2.P$AD16
P0.21: U2.P$AC17
P0.22: U2.P$AD18
P0.23: U2.P$AC19
P0.24: U2.P$AD20
P0.25: U2.P$AC21
P0.26: U2.P$G1
P0.27: U2.P$H2
P0.28: U2.P$B11
P0.29: U2.P$A10
P0.30: U2.P$B9
P0.31: U2.P$A8
P1.01: DMG2305UX-7.1 R_PWR_EPD.1 U2.P$Y23
P1.02: C32.2 R7.1 SW_DN.2 U2.P$W24
P1.03: U2.P$V23
P1.04: U2.P$U24
P1.05: U2.P$T23
P1.06: U2.P$R24
P1.07: U2.P$P23
P1.09: U2.P$R1
P1.10: U2.P$A20
P1.11: U2.P$B19
P1.12: U2.P$B17
P1.13: U2.P$A16
P1.14: U2.P$B15
P1.15: U2.P$A14
PMIC_INT: IC2.A1 U2.P$T2
PREVGH: D2.1 EPD_C9.1 J2.21
PREVGL: D5.2 EPD_C11.1 J2.23
RESE: J2.3 Q3.2 R1_EP_DR1.2
RESET: J3.6 TP_RESET.TP U2.P$AC13
RF: ANT1.1 C21.1 C22.1 L1.2
SCK: J2.13 U2.P$A12
SCL: IC1.C1 IC2.B1 IC3.12 R4.1 R17.2 TP_SCL.TP U1.7 U2.P$M2
SDA: IC1.B2 IC2.C1 IC3.2 R2.1 R18.2 TP_SDA.TP U1.8 U2.P$L1
SWDCLK: J3.4 TP_SWDCLK.TP U2.P$AA24
SWDIO: J3.2 TP_SWIO.TP U2.P$AC24
SWO: TP_SWO.TP U2.P$AD22
VBAT: C9.2 C37.2 IC2.C2 TP_VBAT.TP U1.2 U1.3
VBUS: C1.1 C4.1 C6.1 C38.2 D4.5 IC2.A2 J1.A4_B9 J1.A9_B4 U2.P$AD2
VREG: C23.1 C24.2 C39.1 IC2.B2 IC9.A1 IC9.A2 IC9.A3 TP_VREG.TP

## Tracks (layer width: path | path; a pad name or v marks a point on that pad's centre or on a via)
3V3  (via drill 0.3)
  Top 0.3: 30.47,22.15 30.47,22.59 30.54,22.66 C12.1 | 30.47,22.15 30.47,21.77 U2.P$A22 | U2.P$B1 24.89,21.26 v24.89,21.83 24.89,21.96 24.38,22.47 C29.1 | v30.22,22.15 30.47,22.15 | J3.1 39.3,30.02 38.98,30.34 38.98,31.74 38.09,32.63 30.35,32.63 28.7,30.98 20.88,30.98 20.31,30.4 20.31,28.69 22.03,26.98 24,26.98 DMG2305UX-7.2 24.12,26.85 R_PWR_EPD.2 24.25,26.28 25.14,25.39 v25.14,24.82 | J3.1 | R8.2 21.48,6.44 20.47,7.45 | 20.47,7.45 20.44,7.48 C19.1 20.63,7.48 20.95,7.8 20.95,8.31 20.5,8.75 18.85,8.75 IC3.10 18.79,8.94 18.79,9.07 v18.47,9.39 | 20.47,7.45 20.38,7.35 18.85,7.35 IC3.7 18.79,7.16 18.79,6.79 18.28,6.27 17.14,6.27 16.76,6.66 | 16.76,6.66 16.76,7.54 17.01,7.8 17.2,7.8 IC3.3 | 16.76,6.66 16.63,6.59 12.7,6.59 11.98,5.88 11.24,6.13 R5.2 7.55,5.45 TP_3.3V.TP | C33.1 37.33,9.7 38.47,9.7 C25.1 | TP_3V3.TP C33.1 | 18.88,14.18 19.55,14.85 C8.2 | 37.33,7.23 37.84,7.23 38.09,6.97 R18.1 | 37.33,7.23 R17.1 | 24.95,16.69 25.2,16.69 25.39,16.5 U2.P$Y2 | 24.95,16.69 U2.P$W1 | 40.38,8.75 40.76,8.75 IC9.E2 | 40.38,8.75 IC9.E3 | 30.41,14.59 30.41,14.02 C34.1 | v39.87,8.75 40.38,8.75 | C14.1 31.05,15.29 U2.P$AD23 30.92,15.16 30.92,15.04 30.47,14.59 30.41,14.59 | 24.95,16.69 v24.95,16.12 | v20.12,12.94 20.12,13.64 C30.1 | v37.33,6.78 37.33,7.23 | v36.7,9.26 37.08,9.64 37.2,9.64 C33.1 | 30.41,14.59 30.46,14.55 30.46,14.37 v30.47,14.35 | 18.88,14.18 18.77,14.07 18.52,14.07 18.09,13.64 IC1.C2 | U2.P$AD14 28.44,15.1 28.62,14.93 28.62,14.78 v28.95,14.45 | 18.88,14.18 v18.76,14.31 | v23.28,16.76 23.35,16.69 24.95,16.69 | v32.76,5.94 R7.2
  Bottom 0.3: 25.2,22.15 v30.22,22.15 | v24.89,21.83 25.2,22.15 | 25.2,22.15 25.14,22.28 v25.14,24.82 25.01,24.88 23.81,24.88 23.36,25.32 22.85,25.32 22.6,25.07 22.6,17.58 23.28,16.9 v23.28,16.76 | 30.41,14.59 28.8,14.59 | 32.76,7.73 32.76,8.43 32.82,8.5 32.82,12.12 30.47,14.47 30.41,14.59 | 32.76,7.73 v32.76,5.94 | v39.87,8.75 37.97,8.75 36.95,7.73 | 32.76,7.73 36.19,7.73 | 36.19,7.73 36.95,7.73 | 24.95,14.47 v24.95,16.12 | 24.95,14.47 24.82,14.4 24,13.58 22.23,13.58 21.59,12.94 v20.12,12.94 18.98,14.08 | v37.33,6.78 37.33,7.29 37.02,7.61 36.95,7.73 | v36.7,9.26 36.7,9 36.19,8.5 36.19,7.73 | v18.47,9.39 17.9,9.39 17.27,10.02 17.27,12.62 18.66,14.02 18.85,14.02 18.98,14.08 | 30.41,14.59 30.46,14.55 30.46,14.37 v30.47,14.35 | v28.95,14.45 28.8,14.59 | 28.8,14.59 28.7,14.59 28.15,14.05 25.25,14.05 24.95,14.34 24.95,14.46 24.95,14.47 | 18.98,14.08 v18.76,14.31
ALERT  (via drill 0.3)
  Top 0.15: v32.95,20.37 32.76,20.37 31.62,19.23 31.49,19.23 U2.P$J24 | v43.55,15.67 44.25,15.67 44.63,16.05 U1.5
  Route15 0.15: v43.55,15.67 41.78,17.45 35.3,17.45 34.75,18 34.75,20.13 34.42,20.45 33.97,20.45 33.88,20.37 v32.95,20.37
D+
  Top 0.15: D4.4 28.82,10.27 28.79,10.3 28.05,10.3 25.97,12.39 25.97,13.01 26.39,13.43 26.39,15.16 26.4,15.18 U2.P$AD6
D-
  Top 0.15: D4.6 28.82,8.43 28.51,8.43 28,8.94 28,9.97 25.69,12.27 25.69,13.13 25.9,13.34 25.9,15.18 U2.P$AD4
DEC1
  Top 0.127: 24.95,20.75 25.08,20.88 25.14,20.88 | C2.1 25.08,23.8
  Top 0.15: 25.14,20.88 25.33,21.07 25.33,22.02 25.08,22.27 25.08,22.28 25.08,23.8 | 24.95,20.75 U2.P$C1
DEC3
  Top 0.15: U2.P$D23 30.98,20.5 30.98,21.32 32.32,22.66 C11.1
DEC4_6  (via drill 0.3)
  Top 0.127: C28.1 27.74,24.18 | 32.89,21.01 C7.1
  Top 0.15: U2.P$E24 31.49,20.24 32.19,20.24 32.95,21.01 C7.1 | C28.1 27.55,24.31 C16.1 | v26.6,23.23 26.79,23.23 27.11,22.91 27.11,22.15 26.98,22.02 26.79,22.02 26.22,21.45 26.22,21.26 U2.P$B5 | L3.2 28.51,22.53 28.38,22.66 v28.38,23.23 27.74,23.86 27.74,24.18 | v32.89,21.7 32.89,21.01
  Bottom 0.15: v28.38,23.23 v26.6,23.23 26.6,24.56 26.92,24.88 26.92,29.99 27.8,30.88 30.11,30.88 32.77,28.22 32.78,28.22 32.89,28.12 v32.89,21.7
DN  (via drill 0.3)
  Top 0.15: 26.06,28.21 26.22,28.37 26.22,28.94 J1.B7 | 26.06,28.21 26.03,28.18 25.52,28.18 25.33,28.37 25.33,28.94 J1.A7 | v32.32,8.75 32,8.43 31.36,8.43 D4.1 | v27.05,24.37 27.05,27.23 26.06,28.21
  Route2 0.127: 28.19,22.59 28.19,15.99
  Route2 0.15: v32.32,8.75 32.32,9.51 29.91,11.91 29.91,14.26 28.19,15.99 | 28.19,22.59 27.05,23.74 v27.05,24.37
DP  (via drill 0.3)
  Top 0.127: 24.82,29.01 J1.B6 | 31.36,10.27 D4.3
  Top 0.15: 24.82,29.01 24.82,29.58 25.01,29.77 25.52,29.77 25.71,29.58 25.71,29.01 J1.A6 | 31.36,10.27 31.36,12.75 32.6,13.99 v32.6,14.21 | v26.47,25.96 26.47,26.72 24.82,28.37 24.82,28.94 J1.B6
  Route2 0.15: v26.47,25.96 28.95,23.48 28.95,22.59 29.97,21.58 30.09,21.58 32.51,19.16 32.51,18.66 31.43,17.58 31.43,17.07 31.55,16.94 31.55,16.18 32.6,15.13 v32.6,14.21
EPD_3V3  (via drill 0.3)
  Top 0.3: 10.79,15.8 EPD_C5.2 12.63,15.93 12.63,17.33 v15.94,20.63 | 10.79,15.8 10.72,15.74 J2.16 | J2.15 10.72,16.18 10.72,15.93 10.79,15.8 | L5.2 11.17,33.32 | 11.17,33.32 C1-EP-DR.1 | 11.17,33.32 12.63,33.32 12.69,33.39 19.49,33.39 19.61,33.26 19.61,28.75 21.97,26.4 21.97,25.96 DMG2305UX-7.3 21.84,25.9 21.52,25.58 v21.2,25.58
  Bottom 0.3: v21.2,25.58 20.88,25.58 v15.94,20.63
EPD_BUSY  (via drill 0.3)
  Top 0.15: U2.P$AD12 27.93,15.16 27.93,13.95 27.37,13.38 27.37,12.15 v28.12,11.4 | v13.65,20 13.63,20 12.9,19.27 12.38,19.27 12.31,19.2 J2.9
  Route2 0.15: v28.12,11.4 26.9,11.4 26.03,10.53 26.03,10.4 25.46,9.83 24.25,9.83 23.87,9.45 23.87,8.94 23.55,8.62 21.84,8.62 13.65,16.81 v13.65,20
EPD_CS  (via drill 0.15)
  Top 0.15: J2.12 11.31,17.7 v11.5,17.89
  Route15 0.15: U2.P$K2 20.31,18.97 19.13,17.79 11.72,17.79 11.62,17.89 v11.5,17.89
  other vias: 25.44,18.97
EPD_DC  (via drill 0.15, 0.3)
  Top 0.15: v26.93,12.03 26.99,12.09 26.99,14.76 U2.P$AD10 | v12.02,18.46 11.86,18.3 11.41,18.3 11.31,18.2 J2.11
  Route2 0.15: v12.02,18.46 11.81,18.25 18.13,11.94 v18.13,11.54
  Bottom 0.127: 20.28,11.42 20.31,11.42 | 26.95,12.05 v26.93,12.03
  Bottom 0.15: 26.95,12.05 26.95,13.03 26.88,13.1 22.25,13.1 20.57,11.42 20.31,11.42 | 20.28,11.42 20.15,11.54 v18.13,11.54
EPD_RST  (via drill 0.15)
  Top 0.15: v23.87,14.91 v22.6,16.18 | J2.10 11.76,18.7 11.87,18.81 12.42,18.81 v12.53,18.92
  Route15 0.15: U2.P$AC11 27.08,15.11 24.07,15.11 v23.87,14.91 | v22.14,17.67 21.92,17.45 v20.06,17.45
  Bottom 0.15: v22.6,16.18 22.24,16.54 22.24,17.67 v22.14,17.67 | v20.06,17.45 18.79,18.72 12.72,18.72 v12.53,18.92
  other vias: 27.69,15.72
GDR  (via drill 0.3)
  Top 0.15: 11.23,26.79 13.27,26.79 Q3.1 | 11.23,26.79 10.92,26.79 10.9,26.79 10.28,27.41 10.28,27.42 R2_EP_DR.2 | v11.23,23.67 11.23,22.97 10.98,22.72 10.72,22.72 J2.2 | 11.23,26.79 v11.23,26.02
  Bottom 0.15: v11.23,26.02 v11.23,23.67
GND  (via drill 0.15, 0.3)
  Top 0.15: 41.59,6.02 41.59,7.2 41.31,7.48 41.21,7.48 IC9.B1 IC9.C1 | IC2.D2 v42.24,12.27
  Top 0.3: 30.41,13.51 30.09,13.51 29.84,13.77 C34.2 | C14.2 32.89,15.05 32.55,14.72 32.39,14.72 31.19,13.51 30.41,13.51 | D4.2 32.51,9.32 32.82,9 32.82,8.5 32.57,8.24 32.51,8.24 C6.2 | 30.41,7.99 30.41,8.75 30.92,9.26 31.24,9.26 D4.2 | 30.41,13.51 30.41,9.83 30.86,9.39 D4.2 | 24.76,6.53 26.47,6.53 27.11,7.16 27.16,7.16 27.3,7.23 29.01,7.23 29.71,7.92 30.28,7.92 30.41,7.99 | 24.76,6.53 23.93,7.35 23.85,7.39 | 23.85,7.39 23.81,7.42 23.81,7.38 C10.1 23.81,9.44 23.55,9.7 C31.2 22.35,9.77 22.03,9.77 21.08,10.72 21.08,10.78 | 21.08,10.78 C30.2 | 24.76,6.53 24.69,6.4 24.44,6.15 24.44,4.02 SW_ENT.1 | 14.16,27.1 13.84,27.42 10.85,27.42 R2_EP_DR.1 | 14.16,27.1 14.16,23.8 12.95,22.59 12.82,22.59 EPD_C2.2 13.01,22.47 13.46,22.02 13.46,20.69 12.95,20.18 EPD_C1.2 12.44,19.74 10.72,19.74 J2.8 10.53,19.74 10.22,19.74 | SJ1.1 5.45,27.74 6.85,26.34 7.11,26.34 10.03,23.42 10.03,19.93 10.22,19.74 | D1.1 6.47,31.55 2.34,27.42 2.34,26.79 TP_GND.TP 2.28,26.66 3.36,25.58 6.47,25.58 7.49,24.56 7.49,24.5 7.99,23.99 J2.MP1 7.93,23.86 7.93,11.04 J2.MP2 7.99,10.91 7.8,10.72 7.8,8.94 EPD_C11.2 7.87,8.81 8.12,8.56 8.12,8.5 8.31,8.31 11.11,8.31 11.61,8.81 EPD_C12.2 13.01,8.94 13.9,9.83 13.9,9.96 EPD_C10.2 14.03,10.08 14.03,10.97 EPD_C9.2 14.6,11.1 | 19.74,15.42 20.06,15.1 20.06,14.66 19.24,13.84 19.24,12.97 18.94,12.68 17.91,12.68 17.52,13.07 IC1.B1 | 19.74,15.42 19.55,15.42 C8.1 | 20.16,15.89 19.81,15.55 19.74,15.42 | C18.1 23.23,21.13 23.62,20.75 23.62,19.85 21.38,17.61 21.35,17.61 21.05,17.31 21.05,16.79 20.16,15.89 | 14.47,13.89 15.49,13.89 C3.1 | 14.47,13.89 EPD_C8.2 | EPD_C7.2 12.69,13.96 13.33,13.96 13.84,13.45 EPD_C8.2
  Top 0.3: EPD_C6.2 13.84,15.61 13.52,15.29 EPD_C5.1 12.44,15.23 10.72,15.23 J2.17 10.53,15.23 10.22,15.23 10.03,15.42 10.03,19.48 10.15,19.61 10.22,19.74 | 14.47,13.89 14.47,15.1 13.96,15.61 EPD_C6.2 | 16.38,10.66 16.38,10.47 R3.1 | 16.38,10.66 15.93,11.1 14.6,11.1 | 14.6,11.1 14.6,12.81 14.09,13.32 EPD_C8.2 | 20.16,15.89 18.35,17.7 14.92,17.7 13.9,16.69 13.9,15.8 EPD_C6.2 | 21.08,10.78 16.44,10.78 16.38,10.66 | IC9.C3 IC9.C2 IC9.C1 41.33,7.92 42.16,8.75 | 42.16,8.75 42.16,10.85 R1.1 42.28,10.91 42.86,10.91 42.98,11.04 | 44.38,7.8 44.89,7.29 C24.1 | 42.98,11.04 45.33,13.39 45.33,13.89 C39.2 | U1.9 43.68,17.01 43.17,17.51 42.73,17.51 U1.1 | U1.6 44.63,16.62 43.94,16.62 43.81,16.75 U1.9 | U1.9 43.75,16.62 43.24,16.12 42.79,16.12 U1.4 42.67,16.05 42.36,15.75 41.47,15.75 41.45,15.78 C9.1 39.81,15.67 39.02,14.88 | C25.2 C33.2 37.2,8.75 36.19,8.75 | 36.19,8.75 34.6,7.16 34.6,6.02 35.07,5.55 C32.1 | 37.81,13.67 36,11.86 36,9 36.13,8.88 36.19,8.75 | 37.81,13.67 39.02,14.88 | 41.59,6.02 40.89,5.32 40.89,3.16 40.44,2.72 37.33,2.72 36.09,3.96 SW_DN.1 | 37.46,22.66 37.2,22.91 C27.2 36.82,22.97 34.98,22.97 34.47,23.48 31.74,23.48 31.24,22.97 31.11,22.91 | 37.46,22.66 37.46,21.77 36.95,21.26 X1.2 | 29.84,23.04 C13.2 | 29.84,23.04 C28.2 28.63,24.31 28.12,24.82 28.12,25.71 C16.2 28.12,25.83 28.12,27.86 | 31.11,22.91 C12.2 | 31.11,22.91 30.86,23.16 29.9,23.16 29.84,23.04 | 26.41,20.31 26.66,20.56 26.66,21.2 U2.P$B7 | U2.P$F23 30.92,19.99 30.28,19.99 30.03,20.24 U2.P$74 26.41,20.31 | 33.52,22.28 33.33,22.28 32.95,22.66 C11.2 | 33.52,22.28 C26.2 | 33.52,22.28 33.52,21.13 C7.2 C20.2 33.65,19.8 34.19,19.8
  Top 0.3: 34.19,19.8 35.68,19.8 X1.4 | 23.36,23.04 C29.2 23.43,22.66 v23.87,22.21 | C2.2 24.19,23.8 23.49,23.1 23.36,23.04 | C21.2 35.24,16.43 35.81,15.86 C22.2 35.75,15.48 35.75,15.29 35.56,15.11 35.04,15.11 34.88,15.27 34.88,15.29 33.42,16.75 32.76,16.75 C15.2 32.63,16.88 32.44,16.88 v32,17.32 | 28.12,27.86 R1_USB.1 | 28.12,27.86 28.7,28.43 28.7,28.94 J1.A1_B12 28.82,29.07 29.27,29.07 29.71,29.51 J1.SH3 29.9,29.51 30.79,28.63 35.87,28.63 36.32,29.07 36.63,29.07 J3.5 J3.3 | R2_USB.2 22.79,27.86 22.79,27.99 22.35,28.43 22.35,28.94 J1.A12_B1 22.22,29.07 21.65,29.07 21.2,29.51 J1.SH4 | 18.79,8.05 18.79,8.24 IC3.9 18.74,8.24 18.37,8.24 v18.3,8.17 | 18.79,8.05 18.79,7.86 IC3.8 | 18.79,8.05 C19.2 | v8.88,26.85 8.63,27.1 8.63,27.36 R_TYPE_SEL.1 | C1-EP-DR.2 20.88,33.96 21.14,33.71 J1.SH2 | v14.6,5.07 14.34,4.81 14.09,4.81 13.96,4.75 13.96,4.57 13.4,4.01 SW_UP.1 13.36,4.91 C5.1 | 26.41,20.31 U2.P$75 | 14.16,27.1 v14.22,26.98 | C37.1 45.21,10.28 C23.2 44.38,7.8 | 42.16,8.75 42.42,8.75 42.65,8.99 43.19,8.99 44.38,7.8 | C38.1 39.22,12.26 37.81,13.67 | v42.92,11.1 42.98,11.04 | 39.02,14.88 38.94,14.95 v38.94,15.47 | IC1.B3 17.52,14.21 17.2,14.52 v17.2,14.93 | TP_VBAT_GND.TP 40.38,19.23 v40.38,19.99 | 37.46,22.66 37.59,22.53 v39.59,22.53 | v34.19,19.9 34.19,19.8 | 23.36,23.04 22.72,23.68 22.72,24.04 22.06,24.69 C17.1 | 30.41,7.99 30.91,7.49 30.91,6.2 C4.2 | 23.85,7.39 24.23,7.77 C1.2
  Route15 0.15: 42.24,11.78 v42.24,12.27
  Route15 0.3: v42.92,11.1 42.24,11.78 | v40.38,19.99 40.38,21.26 39.59,22.05 v39.59,22.53
  Bottom 0.3: U2.P$87 26.35,16.62 24.67,16.62 21.89,13.85 19.93,13.85 18.97,14.81 18.55,14.81 18.33,14.59 17.27,14.59 | 14.22,26.85 18.47,26.85 21.14,29.51 J1.SH4 | 14.22,26.85 v8.88,26.85 | 18.22,8.24 18.22,8.43 16.82,9.83 16.82,14.08 17.27,14.53 17.27,14.59 | v14.6,5.07 16.44,5.07 18.16,6.78 18.16,8.12 18.22,8.24 | v32,17.32 30.54,17.32 30.03,17.83 U2.P$86 | v23.87,22.21 23.87,22.09 25.65,20.31 26.35,20.31 U2.P$75 | J1.SH3 29.9,29.51 31.24,28.18 31.24,21.32 32.7,19.86 34.03,19.86 34.19,19.7 | v14.22,26.98 14.22,26.85 | 34.19,19.7 38.43,15.47 v38.94,15.47 | 18.22,8.24 v18.3,8.17 | 17.27,14.59 17.2,14.65 v17.2,14.93 | v34.19,19.9 34.19,19.7
  pour Route2: -1.45,-2.79 47.92,-2.79 47.92,38.96 -1.45,38.96
HAPTIC_EN
  Top 0.15: IC1.A1 17.08,13.13 17.08,12.83 17.58,12.33 20.14,12.33 20.57,12.75 20.57,14.96 20.72,14.96 22.34,16.57 22.34,16.68 22.85,17.19 23.45,17.19 23.52,17.12 24.85,17.12 U2.P$U1
IMU_INT1  (via drill 0.3)
  Top 0.15: v17.39,6.78 17.84,7.23 IC3.5 | v24.21,17.8 24.63,18.22 U2.P$N1
  Bottom 0.127: 20.22,15.01 20.22,14.99 | 22.34,15.04 22.35,15.04
  Bottom 0.15: v17.39,6.78 16.44,7.73 16.44,14.23 16.22,14.45 16.22,14.8 16.78,15.36 19.87,15.36 20.22,15.01 | 22.35,15.04 22.35,15.05 24.21,16.91 v24.21,17.8 | 22.34,15.04 22.16,14.85 22.16,14.61 21.75,14.2 21.01,14.2 20.22,14.99
IMU_INT2  (via drill 0.15)
  Top 0.15: IC3.6 18.13,7.42 18.13,7.54 18.01,7.66 18.01,7.65 18.3,7.36 v18.3,6.9
  Route15 0.15: 17.74,10.27 17.74,7.87 18.3,7.31 v18.3,6.9
  Route15 0.152: 17.74,10.27 U2.P$P2
  other vias: 25.44,17.97
LX1
  Top 0.127: 40,6.78 40,7.29 | 39.75,4.12 L7.1
  Top 0.15: IC9.B2 40.76,7.54 40.38,7.54 IC9.B3 40.32,7.54 40.25,7.54 40,7.29 | 40,6.78 40.51,6.27 40.51,4.88 39.75,4.12
LX2  (via drill 0.3)
  Top 0.127: 42.16,4.43 41.84,4.12 L7.2
  Top 0.15: IC9.D2 40.76,8.37 40.38,8.37 IC9.D3 40.32,8.31 39.68,8.31 39.43,8.56 39.43,9.13 40.38,10.08 v41.33,10.08 | 42.16,4.43 v42.16,7.99
  Bottom 0.15: v41.33,10.08 41.33,9.83 42.16,9 v42.16,7.99
MOSI  (via drill 0.15)
  Top 0.15: v11.84,16.67 10.69,16.67 J2.14
  Route15 0.15: U2.P$B13 21.29,21.22 18.34,18.27 v14.84,18.27
  Bottom 0.15: v14.84,18.27 13.24,16.67 v11.84,16.67
  other vias: 28.19,21.22
N$1  (via drill 0.3)
  Top 0.15: D5.1 18.73,32.69 18.73,31.48 16.5,29.26 15.68,29.26 C2-EP-DR.1 15.65,29.26 15.09,29.82 15.09,30.09 v14.82,30.37 | v7.23,30.21 6.47,30.21 D1.2
  Bottom 0.15: v7.23,30.21 11.22,30.21 12.05,31.04 14.15,31.04 v14.82,30.37
N$2  (via drill 0.3)
  Top 0.15: v16.31,29.71 15.87,30.15 15.68,30.15 C2-EP-DR.2 | 16.28,26.94 15.42,26.09 Q3.3 | 16.28,26.94 16.31,26.98 v16.31,28.24 L5.1 | 16.28,26.94 17.58,25.64 18.03,25.64 D2.2
  Bottom 0.15: v16.31,28.24 v16.31,29.71
N$3
  Top 0.15: 9.33,26.4 9.33,26.21 R1_EP_DR1.1 | 9.33,26.4 9.33,27.04 9.2,27.17 9.2,27.36 R_TYPE_SEL.2 | 9.33,26.4 8.57,26.4 SJ1.2
N$4
  Top 0.15: IC2.D1 41.78,12.24 41.78,10.97 41.65,10.85 R1.2
N$5
  Top 0.15: IC1.A2 16.99,13.64 16.43,13.08 15.77,13.08 C3.2
N$6
  Top 0.15: R2_USB.1 23.43,27.86 23.43,28.12 23.74,28.43 23.74,28.94 J1.B5
N$7
  Top 0.127: EPD_C6.1
  Top 0.15: EPD_C6.1 10.72,14.66 J2.18
N$8
  Top 0.15: EPD_C7.1 12.69,13.07 12.12,13.07 11.04,14.15 10.72,14.15 J2.19
N$9
  Top 0.15: J2.4 10.72,21.7 11.04,21.7 12.82,23.48 EPD_C2.1
N$10
  Top 0.15: R1_USB.2 26.98,27.86 26.98,28.24 26.79,28.43 26.79,28.94 J1.A5
N$11
  Top 0.127: 12.82,21.13 EPD_C1.1
  Top 0.15: 12.82,21.13 10.79,21.13 10.72,21.2 J2.5
N$12
  Top 0.15: EPD_C8.1 13.96,12.43 12.25,12.43 11.04,13.64 10.72,13.64 J2.20
N$14
  Top 0.15: J2.22 10.72,12.69 10.98,12.69 12.44,11.23 12.44,10.47 12.95,9.96 EPD_C10.1
N$15  (via drill 0.15)
  other vias: 17.96,14.67
N$16
  Top 0.127: EPD_C12.1
  Top 0.15: EPD_C12.1 10.66,11.67 J2.24
N$17  (via drill 0.3)
  Top 0.15: v40.44,9.51 40.57,9.64 41.52,9.64 41.78,9.39 41.78,8.88 41.27,8.37 41.21,8.37 IC9.D1 | v36.7,8.24 38.35,8.24 38.6,7.99 R4.2
  Bottom 0.15: v40.44,9.51 37.97,9.51 v36.7,8.24
N$18  (via drill 0.3)
  Top 0.15: v41.33,9.2 41.21,9.07 41.21,8.75 IC9.E1 | v40.06,6.08 40.06,6.21 39.36,6.91 38.6,6.91 R2.2
  Bottom 0.15: v41.33,9.2 41.33,7.8 40.06,6.53 v40.06,6.08
N$19
  Top 0.15: R3.2 15.87,10.47 15.87,10.15 17.2,8.81 IC3.1
N$20
  Top 0.127: 26.16,15.67 25.33,15.67 22.47,12.81
  Top 0.15: C31.1 22.47,12.81 | 26.16,15.67 U2.P$AC5
N$21
  Top 0.127: 25.39,20.43 25.08,20.43 25.01,20.37 | C17.2
  Top 0.15: 25.01,20.37 24.5,20.37 22.12,22.75 21.66,23.22 X2.1 21.08,23.48 C17.2 | 25.39,20.43 U2.P$D2
N$22  (via drill 0.3)
  Top 0.127: 25.39,19.99 25.08,19.99 25.01,20.05
  Top 0.15: 25.01,20.05 v24.19,20.05 | v23.11,20.05 23.11,20.43 22.98,20.56 C18.2 21.94,20.62 21.84,20.72 X2.2 | U2.P$F2 25.39,19.99
  Bottom 0.15: v23.11,20.05 v24.19,20.05
N$23
  Top 0.15: U2.P$B3 25.71,21.26 25.71,21.64 26.6,22.53 L2.1
N$24
  Top 0.127: 25.71,22.53 L2.2
  Top 0.15: L3.1 27.55,22.88 26.78,23.66 26.42,23.66 25.71,22.95 25.71,22.53
N$25
  Top 0.127: U2.P$A18 29.39,21.77 29.39,22.59 C13.1
N$26
  Top 0.15: U2.P$N24 31.49,18.21 31.94,18.21 32.76,17.39 C15.1
N$27  (via drill 0.3)
  Top 0.15: v30.98,18.97 30.98,19.42 U2.P$H23 | v31.94,18.91 32.32,18.91 32.35,18.88 | 32.35,18.88 L1.1 | 32.35,18.88 32.95,19.48 32.95,19.74 C20.1
  Bottom 0.15: v30.98,18.97 31.87,18.97 v31.94,18.91
N$28  (via drill 0.3)
  Top 0.15: v32.06,21.26 31.49,21.26 U2.P$B24 | C26.1 34.54,22.14 34.25,21.86 v34.03,21.64 34.09,21.64 35.28,20.45 36.25,20.45 36.89,19.81 X1.1
  Bottom 0.15: v32.06,21.26 33.65,21.26 v34.03,21.64
N$29
  Top 0.127: 35.68,21.77 35.65,21.8 | 35.68,21.26 X1.3
  Top 0.15: 35.68,21.26 35.68,21.77 | U2.P$A23 30.98,21.77 30.98,21.9 31.33,22.24 31.45,22.36 31.45,22.37 32.18,23.1 34.35,23.1 34.88,22.58 34.88,22.57 35.65,21.8 36.19,22.34 36.95,22.34 C27.1
OUT+
  Top 0.15: IC1.A3 16.96,14.2 16.47,14.2 15.36,15.3 TP_OP.TP
OUT-
  Top 0.15: TP_ON.TP 17.77,16.37 18.32,15.83 18.32,14.52 18.02,14.23 IC1.C3
P0.13  (via drill 0.3)
  Top 0.15: SW_UP.2 10.56,4.03 R5.1 10.78,5.12 11.66,5.12 12.04,5.51 13.44,5.51 18.01,5.51 19.22,6.72 v20.06,6.72 | U2.P$AD8 26.66,14.94 26.66,13.08 26.4,12.81 v26.4,12.68
  Top 0.3: C5.2 13.44,5.51
  Bottom 0.127: 26.41,12.81 26.4,12.8 v26.4,12.68
  Bottom 0.15: v20.06,6.72 26.16,12.81 26.41,12.81
P0.14  (via drill 0.3)
  Top 0.127: 21.84,4.81 21.57,4.81 R8.1
  Top 0.15: v26.73,15.67 27.17,15.67 U2.P$AC9 | 21.84,4.81 23.27,6.24 C10.2 23.3,7.4 v23.3,9.2 | R8.1 21.48,4.06 SW_ENT.2
  Route2 0.15: v26.73,15.67 26.73,13.83 23.3,10.4 v23.3,9.2
P1.01  (via drill 0.3)
  Top 0.15: v30.98,15.99 30.98,16.43 U2.P$Y23 | v23.11,24.82 23.87,24.82 24.06,25.01 DMG2305UX-7.1 24.12,25.07 R_PWR_EPD.1
  Bottom 0.127: 28.19,18.15 28.19,16.37 | 26.09,18.47 27.87,18.47
  Bottom 0.15: v30.98,15.99 28.57,15.99 28.19,16.37 | 27.87,18.47 28.19,18.15 | v23.11,24.82 23.11,22.34 25.78,19.67 25.78,18.78 26.09,18.47
P1.02  (via drill 0.3)
  Top 0.15: v32.12,16.43 31.87,16.69 31.49,16.69 U2.P$W24 | v33.44,14.35 33.44,5.24 33.36,5.16 | SW_DN.2 32.76,4.06 R7.1 32.98,5.12 33.33,5.12 33.36,5.16 | 33.36,5.16 34.94,5.16 35.09,5 C32.2
  Route2 0.15: v32.12,16.43 33.44,15.12 v33.44,14.35
PMIC_INT  (via drill 0.15)
  Top 0.15: IC2.A1 41.83,13.45 v41.81,13.43
  Route15 0.127: U2.P$T2 25.95,17.47 26.14,17.27 26.62,17.27 26.99,16.9 26.99,16.42 27.34,16.07 29.28,16.07
  Route15 0.15: 29.28,16.07 30.44,14.91 40.4,14.91 41.02,14.22 v41.81,13.43
  other vias: 25.44,17.47
PREVGH
  Top 0.127: 18.03,29.07 D2.1
  Top 0.15: EPD_C9.1 12.95,11.1 12.95,11.23 10.98,13.2 10.72,13.2 J2.21 10.66,13.26 10.28,13.26 9.65,13.89 9.65,23.29 6.98,25.96 5.77,25.96 4.63,27.1 4.63,28.88 4.76,29.01 6.66,29.01 7.68,30.02 13.9,30.02 15.09,28.83 15.09,28.82 15.22,28.69 16.32,28.69 16.7,29.07 18.03,29.07
PREVGL  (via drill 0.3)
  Top 0.127: 10.34,12.18 10.31,12.15
  Top 0.15: 10.34,12.18 10.66,12.18 J2.23 | EPD_C11.1 8.76,10.59 10.31,12.15 8.44,14.02 v8.44,23.48 | D5.2 15.23,32.69 15.23,31.75 v13.98,30.49
  Bottom 0.15: v8.44,23.48 8.44,27.04 11.9,30.49 v13.98,30.49
RESE
  Top 0.15: R1_EP_DR1.2 10.41,26.21 11.17,25.45 11.68,25.45 | 11.68,25.45 13.27,25.45 Q3.2 | 11.68,25.45 11.68,22.91 10.98,22.21 10.72,22.21 J2.3
RESET  (via drill 0.15, 0.3)
  Top 0.127: 21.97,10.4 22.09,10.27 24.5,10.27
  Top 0.15: J3.6 36.76,28.05 v37.2,28.5 | J3.6 | 24.5,10.27 25.4,9.37 TP_RESET.TP 25.67,10.57 v25.14,11.1 | 21.97,10.4 21.97,14.27 21.45,14.78 v21.45,14.9 | U2.P$AC13 28.2,15.71 v28.2,15.63
  Route15 0.15: v25.14,11.1 25.14,13.34 25.91,13.34 v28.2,15.63
  Bottom 0.15: v37.2,28.5 32.89,28.5 30.23,31.16 27.67,31.16 21.13,24.61 21.13,15.23 v21.45,14.9
RF
  Top 0.127: C21.1 | L1.2
  Top 0.15: C21.1 34.66,16.31 34.66,16.3 35.24,15.73 35.24,15.61 C22.1 | C21.1 34.6,16.43 33.78,17.26 L1.2 36.76,18.47 36.77,18.47 39.44,21.13 ANT1.1
SCK
  Top 0.15: U2.P$A12 28,21.77 28,22.09 28.06,22.15 28.06,22.91 27.03,23.94 26.52,23.94 26.09,24.37 22.88,24.37 22.12,25.13 19.42,25.13 11.55,17.26 10.72,17.26 J2.13
SCL  (via drill 0.15, 0.3)
  Top 0.127: IC1.C1 | 41.75,13.04 41.78,13.07 | 37.33,7.8 R17.2 37.33,7.86
  Top 0.15: 38.6,7.35 38.98,7.73 38.98,10.29 41.6,12.9 41.61,12.9 41.75,13.04 41.52,13.26 41.52,13.64 41.78,13.89 43.3,13.89 45.27,15.86 45.27,16.75 45.02,17.01 44.7,17.01 U1.7 | 41.78,13.07 IC2.B1 | 37.33,7.8 38.16,7.8 38.6,7.35 | 38.6,7.35 R4.1 | 37.33,7.86 36.13,6.66 TP_SCL.TP 36.25,6.72 v36.25,5.32 | IC3.12 17.78,9.76 v18.3,10.27 | v18.74,13.18 18.69,13.13 IC1.C1
  Route15 0.15: U2.P$M2 24.04,18.47 24.03,18.47 v18.74,13.18
  Bottom 0.15: 18.22,10.27 17.77,10.27 17.71,10.34 17.71,12.16 v18.74,13.18 | 18.22,10.27 19.61,8.88 19.61,6.53 20.95,5.19 36.13,5.19 v36.25,5.32 | v18.3,10.27 18.22,10.27
  other vias: 25.44,18.47
SDA  (via drill 0.15, 0.3)
  Top 0.15: v16,9.39 17.08,8.31 17.2,8.31 IC3.2 | v40.89,11.1 40.89,11.8 41.71,12.62 41.78,12.62 IC2.C1 | v39.17,6.47 38.66,6.47 38.6,6.4 | 38.6,6.4 38.16,6.4 R18.2 38.09,6.34 37.84,6.08 TP_SDA.TP | 38.6,6.4 R2.1 | v44,17.9 44.32,17.58 44.63,17.58 U1.8 | U2.P$L1 24.85,18.62 24.33,18.62 24.31,18.64 23.8,18.64 22.27,17.11 21.77,17.11 v21.56,16.9 | IC1.B2 17.5,13.64 v17.48,13.67
  Route15 0.15: v16,9.39 16,12.12 16.29,12.41 16.29,13.44 17.25,13.44 v17.48,13.67
  Bottom 0.127: 41.65,11.1 44,13.45
  Bottom 0.15: 44,13.45 v44,17.9 | 41.65,11.1 v40.89,11.1 40.89,8.18 v39.17,6.47 37.33,4.62 14.41,4.62 14.16,4.88 14.16,5.26 16,7.1 v16,9.39 16,14.28 15.94,14.33 15.94,14.92 16.66,15.64 20.12,15.64 21.28,14.48 21.63,14.48 21.88,14.73 21.88,16.57 v21.56,16.9
SWDCLK  (via drill 0.15)
  Top 0.15: U2.P$AA24 31.49,16.18 31.74,16.18 31.93,15.99 33.68,15.99 34.53,15.14 34.53,15.12 34.94,14.72 35.68,14.72 36.25,15.29 36.25,16.56 37.9,18.21 TP_SWDCLK.TP 39.11,18.97 v39.11,19.99 | J3.4 38.09,27.86 38.09,27.42 39.05,26.47 39.05,23.26 v39.14,23.17
  Route15 0.15: v39.11,19.99 39.11,23.14 v39.14,23.17
SWDIO  (via drill 0.3)
  Top 0.127: J3.2
  Top 0.15: v39.05,27.1 39.05,27.61 J3.2 39.36,27.86 39.55,27.67 40.89,27.67 41.59,28.37 44.63,28.37 TP_SWIO.TP | U2.P$AC24 33.31,15.72 34.22,14.81 34.22,14.7 v34.57,14.35
  Bottom 0.15: v39.05,27.1 39.05,25.32 39.94,24.43 39.94,15.81 38.92,14.78 34.64,14.78 34.57,14.72 v34.57,14.35
SWO
  Top 0.127: 30.22,15.04 30.28,15.04
  Top 0.15: 30.28,15.04 30.41,15.16 U2.P$AD22 | TP_SWO.TP 28.57,13.39 30.21,15.04 30.22,15.04
VBAT  (via drill 0.15, 0.15 pad 0.05)
  Top 0.152: IC2.C2 v42.24,12.67
  Top 0.3: U1.2 42.73,17.01 42.73,16.62 U1.3 42.6,16.56 41.65,16.56 | TP_VBAT.TP 37.71,16.31 39.87,16.31 C9.2 40,16.37 40.19,16.56 41.65,16.56 | C37.2 45.45,11.14 v45.45,12.37 | v41.65,16.18 41.65,16.56
  Route15 0.15: v42.24,12.67 42.92,12.67
  Route15 0.3: v45.45,12.37 v45.46,12.37 45.16,12.67 42.92,12.67 42.92,14.91 v41.65,16.18
VBUS  (via drill 0.15 pad 0.05, 0.3)
  Top 0.15: IC2.A2 v42.24,13.47
  Top 0.3: v27.87,7.92 26.98,7.92 26.28,7.23 26.08,7.23 C1.1 | v29.84,8.69 29.2,9.32 D4.5 | v31.94,7.67 32.38,7.67 C6.1 32.51,7.04 32.12,6.66 31.94,6.48 C4.1 | 27.46,29.93 27.87,29.51 27.87,29.01 J1.A4_B9 | 27.46,29.93 27.24,30.15 23.81,30.15 23.17,29.51 23.17,29.01 J1.A9_B4 | U2.P$AD2 25.46,15.16 v25.46,14.55 25.46,13.39 25.34,13.27 25.34,11.79 v26.77,10.36 | 27.46,29.93 v27.49,29.96 | C38.2 39.66,13.09 v39.11,13.64
  Bottom 0.15: v42.24,13.47 42.24,13.97 41.94,14.27
  Bottom 0.3: v31.94,7.67 30.92,7.67 29.97,8.62 v29.84,8.69 29.08,7.92 v27.87,7.92 26.77,9.02 v26.77,10.36 | 32.63,15.1 28.51,15.1 28.12,14.72 25.63,14.72 v25.46,14.55 | v27.49,29.96 27.49,25.64 30.79,22.34 30.79,20.81 32.63,18.97 32.63,15.1 | 39.11,13.51 v39.11,13.64 | 39.11,13.51 34.7,13.51 33.94,14.27 33.94,14.56 33.4,15.1 32.63,15.1 | 39.11,13.51 40.38,13.51 41.14,14.27 41.94,14.27
VREG  (via drill 0.15 pad 0.05, 0.3)
  Top 0.15: IC2.B2 42.92,13.08 42.97,13.13
  Top 0.3: 40.76,7.1 40.38,7.1 IC9.A3 | 40.76,7.1 IC9.A2 IC9.A1 | v41.08,6.66 41.08,6.72 40.83,6.97 40.76,7.1 | 43.3,6.66 v42.6,6.66 | 43.3,6.66 C24.2 42.92,8.31 v42.92,8.56 | C39.1 44.32,13.89 v44.32,13.13 42.97,13.13 | TP_VREG.TP 44,4.56 44,5.89 43.36,6.53 43.3,6.66 | C23.1 43.3,9.45 v42.92,9.83
  Route15 0.3: v42.92,8.56 v42.92,9.83
  Bottom 0.3: v41.08,6.66 v42.6,6.66 42.67,6.78 44.32,8.43 v44.32,13.13
(copper drawn outside any net)
  shapes: Route2 area x1